# Altium PCB PCB1.PcbDoc
Units mil, origin at the board's own origin, x right, y up, seen from the top; angles counter-clockwise.
Board outline 3195 x 1145 mil, 2 copper layers (Top Layer, Bottom Layer); 8 components, 7 nets, 23 pads, 0 vias.
Unrouted connection lines stored in the file: 1.
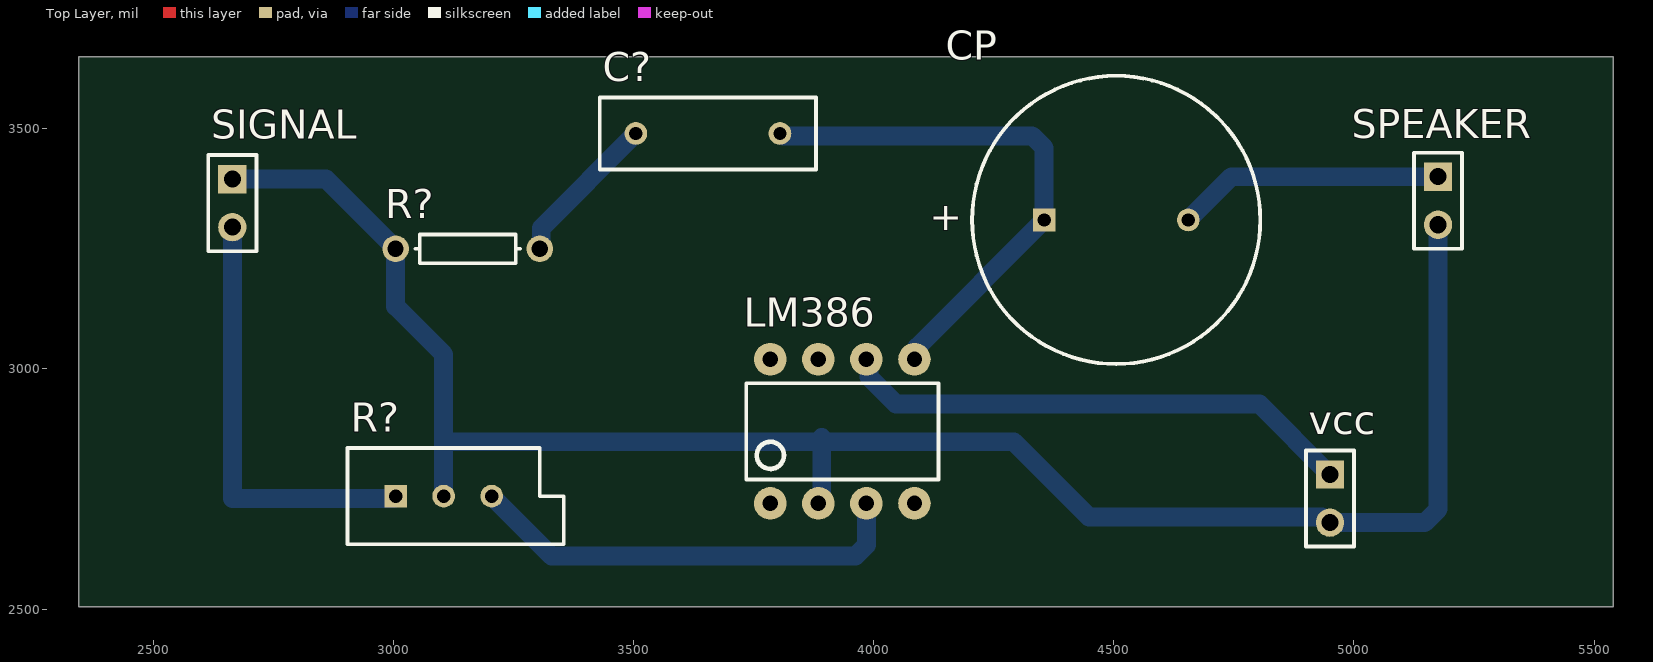
[diagram p0: Top Layer view]
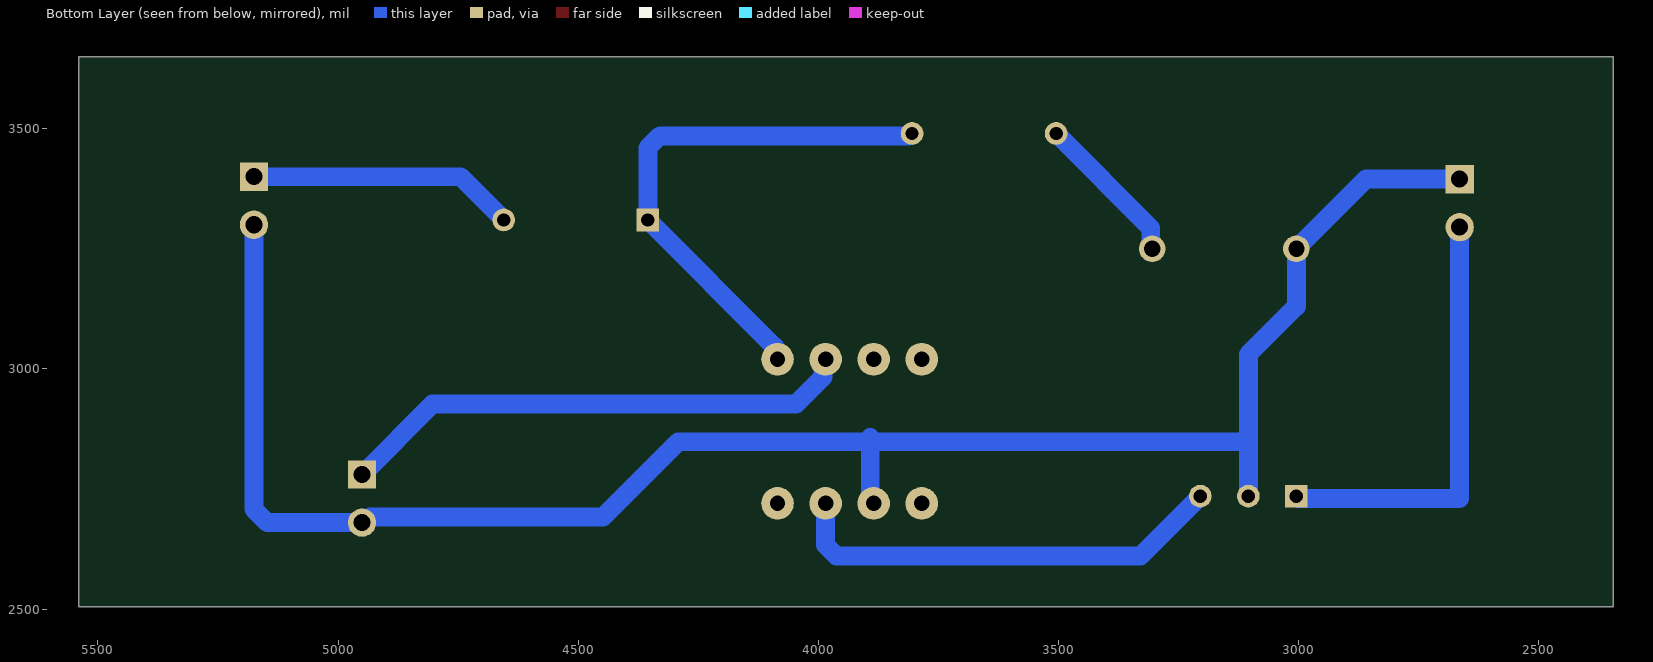
[diagram p1: Bottom Layer view, seen from below]

## Layer stack, top to bottom
Top Solder: solder mask 0.4, Solder Resist, Dk 3.5
Top Layer: signal copper 1.4
Dielectric 1: dielectric 12.6, FR-4, Dk 4.8
Bottom Layer: signal copper 1.4
Bottom Solder: solder mask 0.4, Solder Resist, Dk 3.5

## Board outline
2345,2505 5540,2505 5540,3650 2345,3650

## Design rules (kind name [scope] priority, off if disabled: settings)
Clearance [All] p1: gap=39.37 ignorepadtopadclearanceinfootprint=FALSE
PolygonConnect [All] p1: connectstyle=Direct reliefconductorwidth=10 reliefentries=4 polygonreliefangle="90 Angle" airgapwidth=10
RoutingLayers [All] p1: top layer_v5=FALSE bottom layer_v5=TRUE
RoutingVias [All] p1: holewidth=28 width=50 viastyle="Through Hole" minholewidth=28 minwidth=50 maxholewidth=28 maxwidth=50
SolderMaskExpansion [All] p1: expansion=4 istentingtop=FALSE
Width [All] p1: maxlimit=39.37 minlimit=39.37 preferedwidth=39.37
29 further rules are at their usual default settings.

## Components (designator, comment, footprint, x,y, rotation, side; value= is the part's Value field where it differs from the comment)
C? "Cap" RAD-0.3 3655,3490 r0 top value=0.1uF
CP "Cap Pol1" RB7.6-15 4505,3310 r180 top value=1000uF
LM386 "" DIP08 3935,2870 r0 top
R? "RPot" VR5 3105,2735 r0 top value=1K
R? "Res1" AXIAL-0.3 3155,3250 r180 top value=10
SIGNAL "Header 2" HDR1X2 2665,3395 r270 top
SPEAKER "Header 2" HDR1X2 5175,3400 r270 top
vcc "Header 2" HDR1X2 4950,2780 r270 top

## Footprints (in the part's own frame and the unit in brackets; to place one, negate y for a bottom-side part, rotate by r counter-clockwise, add the part's x,y. Pads: shape width x height; smd on the part's side, far side on the other; paste and mask are expansions set on the pad)
AXIAL-0.3 [mm] "Axial Device, Thru-Hole; 2 Leads; 0.3 in Pin Spacing"
  round 1.4 hole 0.85: 1(-3.81,0) 2(3.81,0)
  silkscreen extent -2.77,-0.76 2.77,0.76
DIP08 [mil]
  round 68 hole 32: 1(-150,-150) 2(-50,-150) 3(50,-150) 4(150,-150) 5(150,150) 6(50,150) 7(-50,150) 8(-150,150)
  silkscreen extent -200,-100 200,100, body extent -215,-182 215,182, height 210
HDR1X2 [mm] "Connector; Header; 2 Position"
  rect 1.5x1.5 hole 0.9: 1(0,0)
  round 1.5 hole 0.9: 2(2.54,0)
  silkscreen extent -1.27,-1.27 3.81,1.27
RAD-0.3 [mm] "Radial Cap, Thru-Hole; 2 Leads; 0.3 in Pin Spacing"
  round 1.2 hole 0.7: 1(-3.81,0) 2(3.81,0)
  silkscreen extent -5.71,-1.91 5.71,1.91
RB7.6-15 [mm] "Polarized Capacitor (Radial); 2 Leads"
  rect 1.2x1.2 hole 0.7: 1(3.81,0)
  round 1.2 hole 0.7: 2(-3.81,0)
  silkscreen extent -7.62,-7.62 7.62,7.62
VR5 [mm] "Thru-Hole; 3 Leads"
  rect 1.2x1.2 hole 0.7: 1(-2.54,0)
  round 1.2 hole 0.7: 2(0,0) 3(2.54,0)
  silkscreen extent -5.08,-2.54 6.35,2.54

## Part data
C?: "Capacitor", LatestRevisionDate=17-Jul-2002, LatestRevisionNote="Re-released for DXP Platform.", PackageDescription="Radial Cap, Thru-Hole; 2 Leads; 0.3 in Pin Spacing", PackageReference=RAD-0.3, Published=8-Jun-2000, Publisher="Altium Limited"
CP: "Polarized Capacitor (Radial)", LatestRevisionDate=17-Jul-2002, LatestRevisionNote="Re-released for DXP Platform.", PackageDescription="Polarized Capacitor (Radial); 2 Leads", PackageReference=RB7.6-15, Published=8-Jun-2000, Publisher="Altium Limited"
LM386: library part LM386, "low voltage audio power amplifier", Package=None, Availability=Unavailable, MP=LM386, Price=None
R?: "Potentiometer", LatestRevisionDate=17-Jul-2002, LatestRevisionNote="Re-released for DXP Platform.", PackageDescription="Variable Resistor, Thru-Hole; 3 Leads", PackageReference=VR5, Published=8-Jun-2000, Publisher="Altium Limited", Set Position=0.5, Sim Note="Enter the Resistance value and the set point into parameter fields."
R?: "Resistor", LatestRevisionDate=17-Jul-2002, LatestRevisionNote="Re-released for DXP Platform.", PackageDescription="Axial Device, Thru-Hole; 2 Leads; 0.3 in Pin Spacing", PackageReference=AXIAL-0.3, Published=8-Jun-2000, Publisher="Altium Limited"
SIGNAL SPEAKER vcc: "Header, 2-Pin", LatestRevisionDate=17-Jul-2002, LatestRevisionNote="Re-released for DXP Platform.", Publisher="Altium Limited"

## Nets (pads, with @x,y where several pads share a name; then routed paths per layer and width w, separated by ;. In a path a pad name is that pad's centre, name@x,y a point inside that pad or via, vN(x,y) a via of type N, cw(c..) or ccw(c..) an arc to the next point about the centre after c; other vN are vias at no path point)
AMPLIFIED: C?.2 CP.1 LM386.5 | length 1114.5
  Bottom Layer w39.37: C?.2@3805,3486.36 3807.13,3488.49 3808.64,3488.49 3812.13,3485 4330,3485 4355,3460 CP.1 4090.48,3045.48 4090.48,3025.48 LM386.5
AMPLIFIER: LM386.3 R?.3 | length 928.3
  Bottom Layer w39.37: R?.3 3330,2610 3961.94,2610 3985,2633.06 LM386.3
CC: C?.1 R?.1@3305,3250 | length 322.8
  Bottom Layer w39.37: R?.1@3305,3250 3308.01,3253.01 3308.01,3293.01 C?.1
gnd: LM386.2 LM386.4 R?.2 SIGNAL.1 SPEAKER.2 vcc.2 | length 3839.5
  Bottom Layer w39.37: SIGNAL.1 2860,3395 3005,3250 3005,3130 3105,3030 3105,2848.2 ; R?.2@3105,2735 3105,2848.2 ; LM386.2 3891.94,2726.94 3891.94,2856.94 ; SPEAKER.2 5175,2708.06 5146.94,2680 vcc.2 4944.67,2680 4933.26,2691.42 4448.58,2691.42 4291.8,2848.2 3105,2848.2
OUT: CP.2 SPEAKER.1 | length 557.3
  Bottom Layer w39.37: CP.2 4745,3400 SPEAKER.1
SIGNAL: R?.1@3005,2735 SIGNAL.2 | length 907.1
  Bottom Layer w39.37: SIGNAL.2 2665,2730 3000,2730 R?.1@3005,2735
VCC: LM386.6 vcc.1 | length 1082.9
  Bottom Layer w39.37: LM386.6 3990.48,3014.52 3990.48,2982.92 4046.46,2926.94 4803.06,2926.94 vcc.1
pads on no net: LM386.1 LM386.7 LM386.8

## Dimensions
2365,3655 to 2330,2525 on Top Layer
2360,3670 to 5530,3675 on Multi-Layer

## Text inside footprints (layer, text, board x,y; h text height)
CP: Top Overlay "+" at 4184.85,3339.01 h59.06 r180